# Altium PCB ESC ITERATION 2.PcbDoc (part 2 of 2)
Units mm, origin at the board's own origin, x right, y up, seen from the top; angles counter-clockwise.
Board outline 46 x 52 mm, 4 copper layers (Top Layer, Layer 1, Layer 2, Bottom Layer), stack 0.603 mm thick; 168 components, 143 nets, 732 pads, 629 vias.
Unrouted connection lines stored in the file: 310.
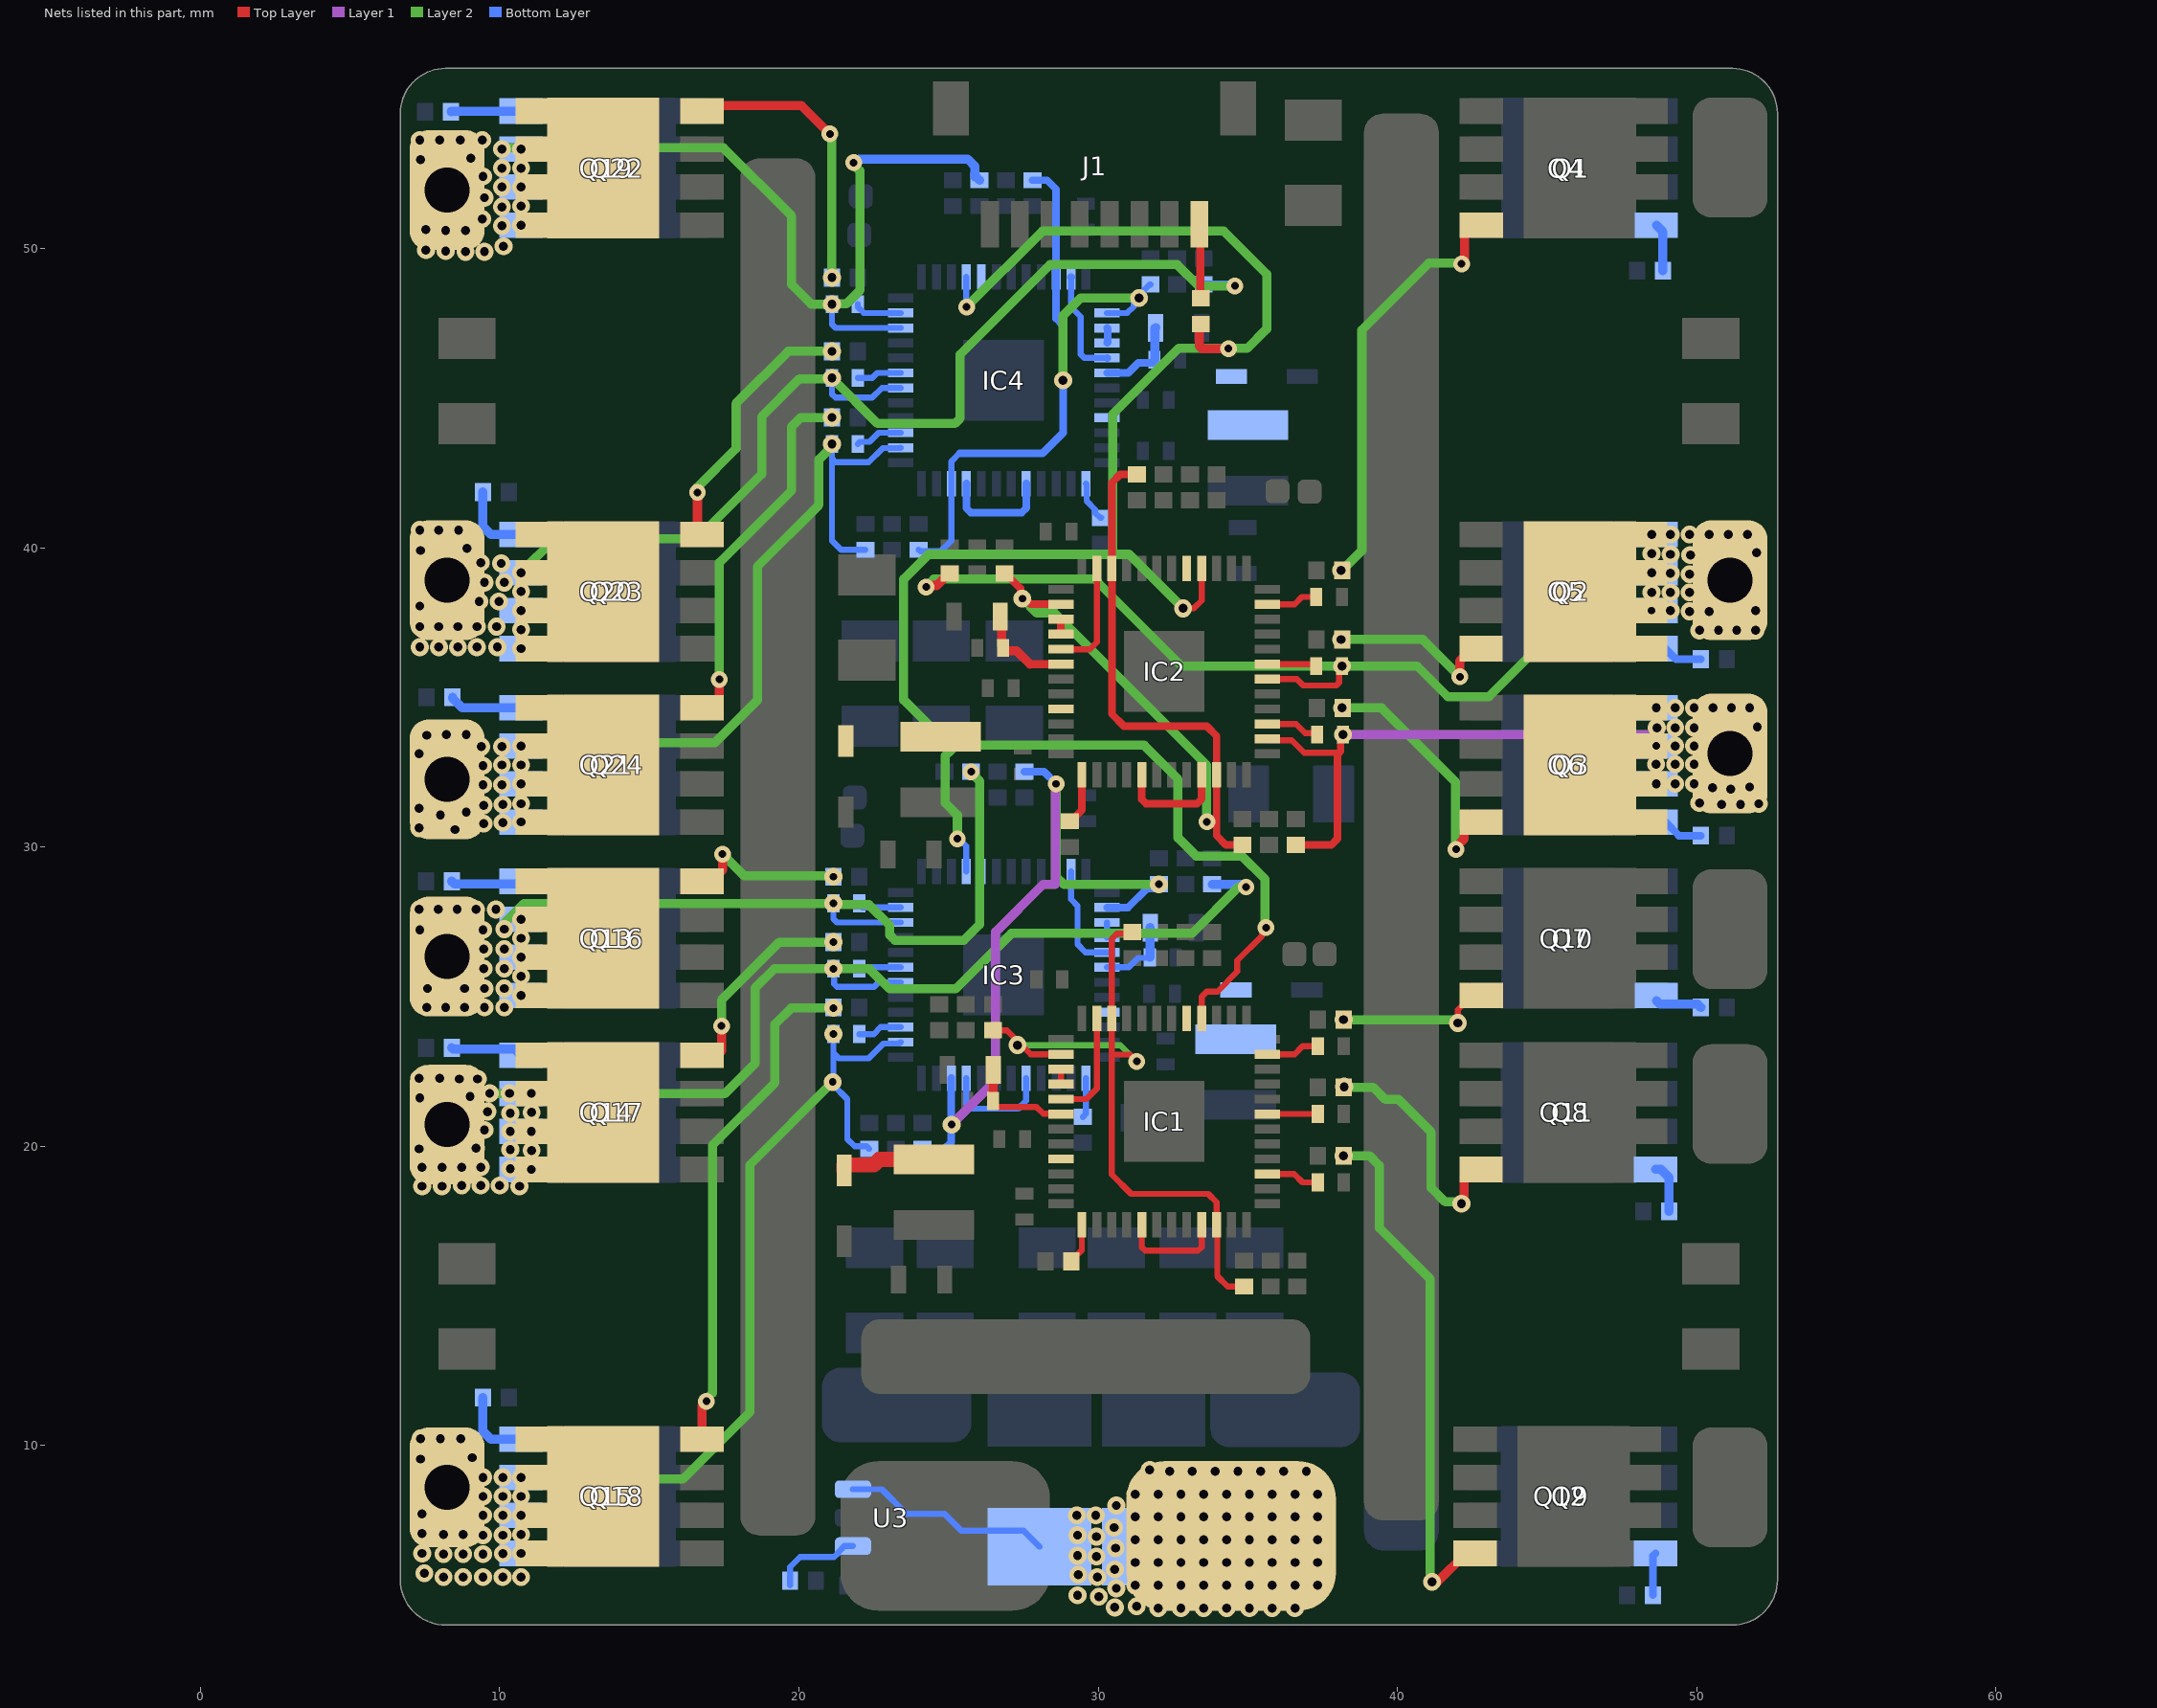
[diagram p4: the nets of this part, all layers, seen from the top]

## Via types
v1: diameter 0.6, hole 0.3, Top Layer to Bottom Layer, tented both sides, 480 vias
v2: diameter 0.559, hole 0.254, Top Layer to Bottom Layer, tented both sides, 127 vias
v3: diameter 1.8, hole 1.5, Top Layer to Bottom Layer, tented both sides, 12 vias
v4: diameter 0.6, hole 0.254, Top Layer to Bottom Layer, tented both sides, 10 vias

## Nets (pads, with @x,y where several pads share a name; then routed paths per layer and width w, separated by ;. In a path a pad name is that pad's centre, name@x,y a point inside that pad or via, vN(x,y) a via of type N, cw(c..) or ccw(c..) an arc to the next point about the centre after c; other vN are vias at no path point) (continued)
MOTOR3B: C7.1 IC2.30 pad.0.8MM@51.105,38.913 Q2.1 Q2.2 Q2.3 Q5.5 Q5.6 Q5.7 Q5.8 Q5.9 R4.1 | length 31.3
  Top Layer w0.203: IC2.30@35.657,35.61 36.638,35.61 36.853,35.395 37.956,35.395 38.049,35.489 38.049,35.941 v1(38.151,36.043)
  Top Layer w0.305: v2(24.252,38.688) 24.301,38.737 24.61,38.737 25.014,39.141 R4.1@25.044,39.141
  Layer 2 w0.305: v2(24.252,38.688) 24.252,38.691 24.514,38.952 29.88,38.952 32.79,36.043 v1(38.151,36.043) 40.658,36.043 41.681,35.02 43.05,35.02 45.901,37.871 48.467,37.871 v2(48.492,37.897)
  other v1: 50.089,37.236 50.724,37.236 51.333,37.236 51.968,37.236 49.759,37.871 50.419,37.871 49.124,37.897 51.968,37.897 48.489,38.506 49.124,38.506 49.759,38.506 49.759,39.116 49.124,39.141 48.492,39.167 49.784,39.751 49.124,39.776 48.489,39.802 51.994,39.827 48.492,40.437 49.124,40.437 49.759,40.437 50.419,40.437 51.054,40.437 51.689,40.437
  other v3: 51.105,38.913
MOTOR3C: C10.1 IC2.26 pad.0.8MM@51.105,33.122 Q3.1 Q3.2 Q3.3 Q6.5 Q6.6 Q6.7 Q6.8 Q6.9 R6.1 | length 18.3
  Top Layer w0.203: IC2.26@35.657,33.61 35.702,33.565 36.474,33.565 36.887,33.152 37.994,33.152 38.024,33.122 ; v1(38.176,33.757) C10.1@38.202,33.731
  Top Layer w0.254: R6.1@36.601,30.073 37.795,30.073 37.998,30.277 37.998,33.096 38.024,33.122 38.1,33.198 38.1,33.63 C10.1@38.202,33.731
  Layer 1 w0.305: v1(38.176,33.757) 48.362,33.757 48.362,33.731 48.648,33.444 v2(48.648,33.376)
  other v1: 50.825,31.42 51.46,31.42 52.07,31.445 50.089,31.471 51.13,31.928 50.521,31.979 51.765,32.004 48.648,32.106 49.276,32.106 49.911,32.106 48.641,32.766 49.276,32.766 49.911,32.766 49.276,33.376 49.911,33.376 48.666,33.985 49.276,33.985 49.911,33.985 52.019,34.011 48.648,34.646 49.276,34.646 49.911,34.646 50.546,34.646 51.156,34.646 51.765,34.646
  other v3: 51.105,33.122
MOTOR4A: C24.1 IC3.34 pad.0.8MM@8.255,26.34 Q13.1 Q13.2 Q13.3 Q16.5 Q16.6 Q16.7 Q16.8 Q16.9 R19.1 | length 25.3
  Layer 2 w0.305: v1@10.033,27.33 10.82,28.118 v4(21.158,28.118) 21.203,28.073 22.342,28.073 23.038,27.377 23.038,27.058 23.216,26.879 25.508,26.879 26.035,27.407 26.035,32.207 25.756,32.486 v2(25.756,32.512)
  Bottom Layer w0.203: v4(21.158,28.118) 21.158,27.599 21.277,27.48 IC3.34@23.398,27.48
  other v1: 7.569,24.638 8.204,24.638 8.839,24.638 9.5,24.638 10.16,24.638 10.721,25.044 7.595,25.273 8.839,25.273 9.5,25.273 10.16,25.273 10.719,25.679 9.474,25.933 10.16,25.933 10.721,26.314 9.474,26.594 10.16,26.594 10.719,26.949 7.341,27.229 7.341,27.229 9.449,27.229 9.449,27.229 10.16,27.254 10.721,27.584 7.315,27.915 7.95,27.915 8.585,27.915 9.22,27.915 9.881,27.915
  other v3: 8.255,26.34
MOTOR4B: C25.1 IC3.30 pad.0.8MM@8.255,20.726 Q14.1 Q14.2 Q14.3 Q17.5 Q17.6 Q17.7 Q17.8 Q17.9 R42.1 | length 34.2
  Layer 2 w0.305: v1(9.673,21.769) 17.54,21.769 18.549,22.777 18.549,25.301 19.182,25.933 v4(21.158,25.933) 22.36,25.933 23.036,25.258 25.243,25.258 27.1,27.114 33.141,27.114 34.689,28.662 v2(34.942,28.662)
  Bottom Layer w0.203: v4(21.158,25.933) 21.184,25.908 21.184,25.425 21.28,25.329 22.516,25.329 22.668,25.48 IC3.30@23.398,25.48
  Bottom Layer w0.305: R42.1@33.807,28.753 34.851,28.753 v2(34.942,28.662)
  other v1: 7.417,18.669 8.077,18.669 10.668,18.669 8.738,18.694 9.373,18.694 10.008,18.694 11.064,19.228 10.363,19.253 7.417,19.304 8.077,19.304 8.738,19.304 9.373,19.304 11.074,19.863 10.363,19.888 7.315,19.914 9.22,19.939 10.363,20.498 11.064,20.498 9.5,20.549 10.363,21.107 11.074,21.133 9.601,21.158 7.341,21.615 9.017,21.666 10.338,21.768 11.064,21.768 8.661,22.25 9.271,22.25 7.315,22.276 8.001,22.276
  other v3: 8.255,20.726
MOTOR4C: C28.1 IC3.26 pad.0.8MM@8.255,8.611 Q15.1 Q15.2 Q15.3 Q18.5 Q18.6 Q18.7 Q18.8 Q18.9 R44.1 | length 27.9
  Layer 2 w0.305: v1@10.719,8.89 16.129,8.89 18.364,11.125 18.364,19.38 v4(21.133,22.149)
  Bottom Layer w0.203: v4(21.133,22.149) 21.133,22.066 21.621,21.578 21.621,20.244 21.866,19.998 22.267,19.998 R44.1@22.352,19.913 ; v4@21.158,22.149 21.158,23.114 ; v4(21.158,23.749) 21.158,23.114 ; IC3.26@23.398,23.48 23.353,23.435 22.825,23.435 22.327,22.936 21.336,22.936 21.158,23.114
  other v1: 8.128,5.613 8.788,5.613 9.449,5.613 10.109,5.613 10.719,5.613 7.493,5.74 8.128,6.375 8.788,6.375 9.449,6.375 7.417,6.401 10.113,6.392 10.719,6.401 9.449,7.01 10.109,7.01 8.128,7.036 8.788,7.036 10.719,7.036 7.417,7.061 9.449,7.671 10.109,7.671 10.719,7.671 7.417,7.722 9.449,8.306 10.109,8.306 10.719,8.306 9.449,8.941 10.109,8.941 10.719,8.941 7.366,9.55 9.093,9.601 7.366,10.236 8.026,10.236 8.712,10.236
  other v3: 8.255,8.611
MOTOR5A: C33.1 IC4.34 pad.0.8MM@8.255,51.943 Q19.1 Q19.2 Q19.3 Q22.5 Q22.6 Q22.7 Q22.8 Q22.9 R57.1 | length 27.9
  Layer 2 w0.305: v1@10.053,53.356 10.719,53.356 17.484,53.356 19.761,51.079 19.761,48.789 20.417,48.133 21.145,48.133 v1(21.107,48.133) 21.127,48.152 21.6,48.152 22.038,48.591 22.038,52.587 21.83,52.795 v2(21.83,52.864)
  Bottom Layer w0.203: v1(21.107,48.133) 21.107,47.458 21.226,47.339 IC4.34@23.398,47.339
  Bottom Layer w0.305: v2(21.83,52.864) 21.899,52.864 22.012,52.977 25.644,52.977 25.888,52.733 25.888,52.391 25.917,52.391 R57.1@26.035,52.273
  other v1: 8.865,49.886 9.5,49.886 8.204,49.911 7.544,49.936 10.135,50.063 8.204,50.597 8.865,50.597 7.544,50.622 10.084,50.749 10.719,50.775 9.423,50.978 10.084,51.384 10.719,51.41 9.5,51.689 10.084,52.045 10.719,52.045 9.449,52.4 10.084,52.68 10.719,52.68 7.366,52.959 9.042,53.01 10.084,53.315 10.719,53.315 7.341,53.619 8.001,53.619 8.687,53.619 9.423,53.619
  other v3: 8.255,51.943
MOTOR5B: C34.1 IC4.30 pad.0.8MM@8.255,38.913 Q20.1 Q20.2 Q20.3 Q23.5 Q23.6 Q23.7 Q23.8 Q23.9 R59.1 | length 36.1
  Layer 2 w0.305: v1(10.719,39.167) 11.849,40.297 16.6,40.297 18.764,42.461 18.764,44.381 20.026,45.642 21.08,45.642 v1(21.107,45.669) 22.631,44.145 25.213,44.145 25.391,44.324 25.391,46.454 28.391,49.454 32.639,49.454 33.35,48.743 v2(34.569,48.743)
  Bottom Layer w0.203: v1(21.107,45.669) 21.107,45.128 21.226,45.009 22.454,45.009 22.783,45.339 IC4.30@23.398,45.339
  Bottom Layer w0.305: R59.1@33.528,48.793 33.553,48.768 34.544,48.768 v2(34.569,48.743)
  other v1: 10.719,36.627 7.341,36.678 7.976,36.678 8.611,36.678 9.246,36.678 9.931,36.678 10.719,37.262 7.341,37.363 7.976,37.363 8.611,37.363 9.246,37.363 9.906,37.363 10.719,37.897 7.341,38.049 9.322,38.202 9.982,38.202 10.719,38.532 9.5,38.837 10.16,38.837 10.058,39.472 9.373,39.497 7.366,39.903 8.915,39.98 7.341,40.589 7.976,40.589 8.636,40.589
  other v3: 8.255,38.913
MOTOR5C: C37.1 IC4.26 pad.0.8MM@8.255,32.258 Q21.1 Q21.2 Q21.3 Q24.5 Q24.6 Q24.7 Q24.8 Q24.9 R61.1 | length 25.1
  Layer 2 w0.305: v1(10.719,33.376) 10.82,33.477 17.196,33.477 18.618,34.9 18.618,39.37 20.676,41.427 20.676,42.948 21.107,43.38 v1(21.107,43.459)
  Bottom Layer w0.203: v1(21.107,43.459) 21.107,42.974 ; R61.1@22.225,39.928 21.413,39.928 21.107,40.234 21.107,42.974 ; IC4.26@23.398,43.339 23.388,43.329 22.808,43.329 22.334,42.855 21.226,42.855 21.107,42.974
  other v1: 8.509,30.582 7.315,30.632 9.474,30.785 10.109,30.81 10.719,30.836 8.026,31.064 8.89,31.166 7.315,31.293 9.474,31.394 10.109,31.42 10.719,31.445 9.449,32.08 10.084,32.08 10.719,32.106 9.449,32.715 10.084,32.741 10.719,32.741 7.315,33.122 9.398,33.35 10.084,33.35 7.569,33.731 8.23,33.757 8.89,33.757
  other v3: 8.255,32.258
NetC6_2: C6.2 IC2.35 | length 1.7
  Top Layer w0.203: IC2.35@35.657,38.11 36.561,38.11 36.805,38.354 C6.2@37.287,38.354
NetC7_2: C7.2 IC2.31 | length 1.7
  Top Layer w0.203: IC2.31@35.657,36.11 37.219,36.11 C7.2@37.287,36.043
NetC10_2: C10.2 IC2.27 | length 1.8
  Top Layer w0.203: IC2.27@35.657,34.11 36.616,34.11 36.92,33.806 37.263,33.806 C10.2@37.312,33.757
NetC18_2: C18.2 IC1.35 | length 1.8
  Top Layer w0.203: IC1.35@35.657,23.078 36.565,23.078 36.83,23.343 C18.2@37.338,23.343
NetC19_2: C19.2 IC1.31 | length 1.7
  Top Layer w0.203: IC1.31@35.657,21.078 35.659,21.08 37.336,21.08 C19.2@37.338,21.082
NetC22_2: C22.2 IC1.27 | length 1.8
  Top Layer w0.203: IC1.27@35.657,19.078 36.548,19.078 36.83,18.796 C22.2@37.338,18.796
NetC24_2: C24.2 IC3.35 | length 1.5
  Bottom Layer w0.203: C24.2@22.022,28.118 22.022,28.082 22.124,27.98 IC3.35@23.398,27.98
NetC25_2: C25.2 IC3.31 | length 1.4
  Bottom Layer w0.203: C25.2@22.022,25.933 22.069,25.98 IC3.31@23.398,25.98
NetC28_2: C28.2 IC3.27 | length 1.5
  Bottom Layer w0.203: C28.2@22.022,23.749 22.504,23.749 22.736,23.98 IC3.27@23.398,23.98
NetC33_2: C33.2 IC4.35 | length 1.6
  Bottom Layer w0.203: C33.2@21.971,48.133 21.971,48.036 22.169,47.839 IC4.35@23.398,47.839
NetC34_2: C34.2 IC4.31 | length 1.5
  Bottom Layer w0.203: C34.2@21.971,45.669 22.454,45.669 22.623,45.839 IC4.31@23.398,45.839
NetC37_2: C37.2 IC4.27 | length 1.6
  Bottom Layer w0.203: C37.2@21.971,43.459 22.047,43.535 22.36,43.535 22.664,43.839 IC4.27@23.398,43.839
NetD1_C: D1.C IC2.9 L1.1
NetD2_C: D2.C IC1.9 L2.1 | length 3.3
  Top Layer w0.508: D2.C@21.514,19.194 21.514,19.376 21.518,19.38 22.504,19.38 22.682,19.558 L2.1@24.511,19.558
NetD3_C: D3.C IC3.9 L3.1
NetD4_C: D4.C IC4.9 L4.1
NetIC1_3: IC1.3 IC1.4 | length 0.5
  Top Layer w0.203: IC1.4@28.757,22.078 IC1.3@28.757,22.578
NetIC1_13: IC1.13 R35.2 | length 1.4
  Top Layer w0.203: R35.2@29.109,16.154 29.109,16.184 29.457,16.533 IC1.13@29.457,17.378
NetIC2_3: IC2.3 IC2.4 | length 0.5
  Top Layer w0.254: IC2.4@28.757,37.11 IC2.3@28.757,37.61
NetIC2_13: IC2.13 R17.2 | length 1.7
  Top Layer w0.254: R17.2@29.058,30.861 29.088,30.861 29.457,31.231 IC2.13@29.457,32.41
NetIC3_3: IC3.3 IC3.4 | length 0.5
  Bottom Layer w0.203: IC3.4@30.298,26.98 IC3.3@30.298,27.48
NetIC3_13: IC3.13 R55.2 | length 1.3
  Bottom Layer w0.203: R55.2@29.489,20.981 29.598,21.089 IC3.13@29.598,22.28
NetIC4_3: IC4.3 IC4.4 | length 0.5
  Bottom Layer w0.254: IC4.4@30.298,46.839 30.321,46.862 30.321,47.316 IC4.3@30.298,47.339
NetIC4_13: IC4.13 R72.2 | length 1.4
  Bottom Layer w0.203: IC4.13@29.598,42.139 29.618,42.119 29.618,41.559 29.901,41.276 29.901,41.164 30.069,40.996 R72.2@30.099,40.996
NetJ1_1: J1.1 R73.2 | length 2.5
  Top Layer w0.279: J1.1@33.385,50.8 33.418,50.767 33.418,48.344 R73.2@33.426,48.336
NetQ1_4: Q1.4 R11.1 | length 1.6
  Bottom Layer w0.305: Q1.4@48.648,50.775 48.87,50.553 R11.1@48.87,49.251
NetQ2_4: Q2.4 R12.1 | length 1.6
  Bottom Layer w0.254: Q2.4@48.648,36.627 48.948,36.627 49.303,36.271 R12.1@50.139,36.271
NetQ3_4: Q3.4 R13.1 | length 1.7
  Bottom Layer w0.254: Q3.4@48.648,30.836 48.948,30.836 49.405,30.378 R13.1@50.139,30.378
NetQ4_4: Q4.4 R14.1 | length 14.3
  Top Layer w0.305: v2(42.143,49.482) 42.143,49.551 42.247,49.655 42.247,50.502 42.52,50.775 Q4.4@42.799,50.775
  Layer 2 w0.305: v1(38.121,39.243) 38.151,39.243 38.811,39.903 38.811,47.269 41.05,49.508 v2@42.136,49.508
NetQ5_4: Q5.4 R15.1 | length 5.9
  Top Layer w0.305: v2(42.088,35.688) 42.088,36.223 42.492,36.627 Q5.4@42.792,36.627
  Layer 2 w0.305: v1(38.121,36.932) 40.844,36.932 v2(42.088,35.688)
NetQ6_4: Q6.4 R16.1 | length 8.5
  Top Layer w0.305: v2(41.961,29.921) 42.009,29.97 42.009,30.053 42.22,30.263 42.22,30.563 42.492,30.836 Q6.4@42.792,30.836
  Layer 2 w0.305: v1(38.146,34.646) 39.467,34.646 41.935,32.177 41.935,29.947 v2(41.961,29.921)
NetQ7_4: Q7.4 R36.1 | length 1.6
  Bottom Layer w0.305: Q7.4@48.648,24.867 48.762,24.752 50.025,24.752 R36.1@50.139,24.638
NetQ8_4: Q8.4 R37.1 | length 1.7
  Bottom Layer w0.305: Q8.4@48.622,19.228 48.8,19.228 49.073,18.955 R37.1@49.073,17.831
NetQ9_4: Q9.4 R38.1 | length 1.4
  Bottom Layer w0.254: R38.1@48.54,5.004 48.54,6.318 Q9.4@48.622,6.401
NetQ10_4: Q10.4 R39.1 | length 5.3
  Top Layer w0.203: v1(42.018,24.119) 42.018,24.563 42.499,25.044 Q10.4@42.799,25.044
  Layer 2 w0.305: v1(38.202,24.232) 41.843,24.232 41.964,24.111 v1@42.044,24.111
NetQ11_4: Q11.4 R40.1 | length 8.2
  Top Layer w0.305: v1(42.139,18.085) 42.22,18.166 42.22,18.955 42.492,19.228 Q11.4@42.792,19.228
  Layer 2 w0.305: v1(38.221,21.99) 38.24,21.971 39.192,21.971 39.601,21.562 40.039,21.562 41.128,20.473 41.128,18.613 41.6,18.141 42.082,18.141 v1(42.139,18.085)
NetQ12_4: Q12.4 R41.1 | length 17.8
  Top Layer w0.305: v1(41.151,5.454) 41.342,5.454 42.289,6.401 Q12.4@42.589,6.401
  Layer 2 w0.305: v1(38.202,19.685) 39.065,19.685 39.395,19.355 39.395,17.272 41.097,15.57 41.097,5.507 v1(41.151,5.454)
NetQ13_4: Q13.4 R49.1 | length 2.4
  Bottom Layer w0.305: R49.1@8.408,28.854 8.497,28.765 10.632,28.765 Q13.4@10.721,28.854
NetQ14_4: Q14.4 R50.1 | length 2.4
  Bottom Layer w0.305: R50.1@8.408,23.292 8.452,23.248 10.509,23.248 Q14.4@10.719,23.038
NetQ15_4: Q15.4 R51.1 | length 2.9
  Bottom Layer w0.305: R51.1@9.449,11.608 9.449,10.483 9.721,10.211 Q15.4@11.064,10.211
NetQ16_4: Q16.4 R52.1 | length 5.5
  Top Layer w0.305: Q16.4@16.764,28.677 16.981,28.677 16.981,28.759 17.448,29.226 v2(17.448,29.762)
  Layer 2 w0.305: v2(17.448,29.762) 18.177,29.032 21.133,29.032 v4(21.158,29.007)
NetQ17_4: Q17.4 R53.1 | length 6.4
  Top Layer w0.305: Q17.4@17.31,23.076 17.415,23.181 v2(17.415,24.023)
  Layer 2 w0.305: v2(17.415,24.023) 17.415,24.885 19.353,26.822 v4(21.158,26.822)
NetQ18_4: Q18.4 R54.1 | length 17.7
  Top Layer w0.305: v2(16.914,11.486) 16.764,11.336 Q18.4@16.764,10.211 17.064,10.211 Q18.4@17.337,10.483
  Layer 2 w0.305: v2(16.914,11.486) 16.914,11.555 17.118,11.759 17.118,20.039 19.202,22.123 19.202,24.079 19.745,24.622 v4(21.158,24.622)
NetQ19_4: Q19.4 R66.1 | length 2.3
  Bottom Layer w0.305: R66.1@8.382,54.559 8.395,54.572 10.706,54.572 Q19.4@10.719,54.585
NetQ20_4: Q20.4 R67.1 | length 2.5
  Bottom Layer w0.305: R67.1@9.449,41.859 9.449,40.709 9.721,40.437 Q20.4@10.719,40.437
NetQ21_4: Q21.4 R68.1 | length 2.5
  Bottom Layer w0.305: R68.1@8.433,35.001 8.433,34.971 8.759,34.646 Q21.4@10.719,34.646
NetQ22_4: Q22.4 R69.1 | length 9.9
  Top Layer w0.305: Q22.4@16.64,54.461 16.516,54.585 Q22.4@16.764,54.585 ; Q22.4@16.764,54.761 20.094,54.761 v2(21.038,53.818)
  Layer 2 w0.305: v2(21.038,53.818) 21.107,53.749 v1(21.107,49.022)
NetQ23_4: Q23.4 R70.1 | length 8.9
  Top Layer w0.305: v2(16.615,41.84) 16.615,40.586 Q23.4@16.764,40.437
  Layer 2 w0.305: v2(16.615,41.84) 16.615,42.018 17.897,43.301 17.897,44.808 19.648,46.558 v1(21.107,46.558)
NetQ24_4: Q24.4 R71.1 | length 12.3
  Top Layer w0.305: Q24.4@16.764,34.646 17.064,34.646 17.344,34.925 v2(17.344,35.602)
  Layer 2 w0.305: v2(17.344,35.602) 17.344,39.492 19.761,41.91 19.761,44.044 20.066,44.348 v1(21.107,44.348)
NetR31_1: R31.1 U3.1 | length 3
  Bottom Layer w0.203: R31.1@19.71,5.334 19.71,5.946 20.048,6.283 21.186,6.283 21.305,6.402 21.305,6.426 21.523,6.645 U3.1@21.808,6.645
PA62: IC1.17 IC1.21 | length 3.6
  Top Layer w0.203: IC1.17@31.457,17.378 31.457,16.634 31.576,16.515 33.338,16.515 33.457,16.634 IC1.21@33.457,17.378
PA63: IC2.17 IC2.21 | length 3.8
  Top Layer w0.254: IC2.17@31.457,32.41 31.457,31.594 31.606,31.445 33.303,31.445 33.457,31.599 IC2.21@33.457,32.41
PA64: IC3.17 IC3.21 | length 3.8
  Bottom Layer w0.203: IC3.21@25.598,22.28 25.598,21.418 25.756,21.26 27.33,21.26 27.598,21.527 IC3.17@27.598,22.28
PA65: IC4.17 IC4.21 | length 3.8
  Bottom Layer w0.254: IC4.21@25.598,42.139 25.598,41.322 25.747,41.173 27.449,41.173 27.598,41.322 IC4.17@27.598,42.139
PF12: IC1.5 IC1.47 | length 3.7
  Top Layer w0.203: IC1.5@28.757,21.578 29.604,21.578 29.957,21.931 IC1.47@29.957,24.278
PF13: IC2.5 IC2.47 | length 3.8
  Top Layer w0.203: IC2.5@28.757,36.61 28.766,36.601 29.718,36.601 29.957,36.841 IC2.47@29.957,39.31
PF14: IC3.5 IC3.47 | length 3.6
  Bottom Layer w0.203: IC3.47@29.098,29.18 29.098,28.25 29.312,28.036 29.312,26.746 29.578,26.48 IC3.5@30.298,26.48
PF15: IC4.5 IC4.47 | length 3.6
  Bottom Layer w0.203: IC4.47@29.093,49.034 29.093,48.041 29.416,47.718 29.416,46.459 29.536,46.34 IC4.5@30.298,46.339
  Bottom Layer w0.254: IC4.47@29.093,49.034 IC4.47@29.098,49.039 ; IC4.5@30.298,46.339 IC4.5@30.298,46.339
TELEM: IC1.40 IC2.40 IC3.40 IC4.40 R73.1 | length 69.7
  Top Layer w0.203: v1@32.944,37.973 33.198,37.973 33.457,38.232 IC2.40@33.457,39.31 ; IC1.40@33.457,24.278 33.457,24.999 33.63,25.171 33.985,25.171 34.65,25.836 34.65,26.206 35.47,27.026 35.47,27.068 35.611,27.209 v2(35.611,27.305)
  Top Layer w0.305: R73.1@33.426,47.472 33.376,47.422 33.376,46.738 33.461,46.652 v2(34.355,46.652)
  Layer 2 w0.305: v2(25.298,30.277) 25.298,31.064 24.892,31.471 24.892,33.045 25.07,33.223 ; v2(25.607,48.039) 28.14,50.573 34.198,50.573 35.632,49.139 35.632,47.306 34.986,46.66 32.69,46.66 30.489,44.459 30.489,39.776 ; v1(32.842,37.973) 31.039,39.776 30.489,39.776 ; v2@35.49,27.228 35.577,27.314 35.577,28.925 34.802,29.7 33.275,29.7 32.669,30.305 32.669,32.267 31.536,33.401 25.248,33.401 25.07,33.223 ; v2@35.567,27.305 v2(35.611,27.305) ; 25.07,33.223 25.07,33.35 23.506,34.914 23.506,38.95 24.333,39.776 30.489,39.776
  Bottom Layer w0.203: v2(25.298,30.277) 25.349,30.277 25.598,30.028 IC3.40@25.598,29.18 ; IC4.40@25.598,49.039 25.598,48.048 v2(25.607,48.039)
TP: IC1.41
TP3: IC2.41
TP4: IC3.41
TP5: IC4.41
VG2: IC1.2 IC1.22 IC1.46 R21.2 R23.2 R25.2 | length 23.6
  Top Layer w0.203: R23.2@26.492,23.876 26.95,23.876 27.308,23.517 v1(27.308,23.381) ; v1@27.563,23.262 27.747,23.078 IC1.2@28.757,23.078 ; R21.2@31.14,27.153 31.089,27.102 30.632,27.102 30.457,26.927 IC1.46@30.457,24.278 30.457,23.063 ; v2(31.293,22.835) 31.064,23.063 30.457,23.063 ; R25.2@34.874,15.316 34.329,15.316 33.983,15.662 33.983,17.352 IC1.22@33.957,17.378 33.957,18.133 33.679,18.411 31.102,18.411 30.457,19.056 30.457,23.063
  Layer 2 w0.203: v1(27.308,23.381) 30.746,23.381 v2(31.293,22.835)
VG3: IC2.2 IC2.22 IC2.46 R1.2 R3.2 R5.2 | length 29.6
  Top Layer w0.254: R3.2@26.873,39.141 26.903,39.141 27.402,38.642 27.402,38.363 27.496,38.363 27.748,38.11 IC2.2@28.757,38.11 ; R1.2@31.293,42.444 30.734,42.444 30.457,42.167 IC2.46@30.457,39.31 30.457,34.443 30.865,34.036 33.63,34.036 33.957,33.708 IC2.22@33.957,32.41 33.957,30.381 34.265,30.074 R5.2@34.823,30.074
  Layer 2 w0.305: v4(27.469,38.297) 27.94,37.826 28.535,37.826 33.63,32.731 33.63,30.847 v2(33.634,30.843)
VG4: IC3.2 IC3.22 IC3.46 R18.2 R20.2 R43.2 | length 28.9
  Layer 1 w0.305: v4(25.104,20.726) 26.576,22.198 26.576,27.16 28.169,28.753 28.575,28.753 28.575,32.085 v2(28.598,32.108)
  Layer 2 w0.305: v2(28.598,32.108) 28.598,29.008 28.853,28.753 v4(32.029,28.753)
  Bottom Layer w0.254: R43.2@24.13,19.913 24.866,19.913 25.095,20.142 25.095,22.278 IC3.22@25.098,22.28 ; R18.2@27.534,32.512 28.194,32.512 v2(28.598,32.108) IC3.46@28.598,29.18 ; IC3.2@30.298,27.98 31,27.98 31.629,28.61 R20.2@31.886,28.61
VG5: IC4.2 IC4.22 IC4.46 R56.2 R58.2 R60.2 | length 24.1
  Layer 2 w0.305: v1(28.829,45.593) 28.829,47.752 29.413,48.336 v1(31.369,48.336)
  Bottom Layer w0.203: R60.2@24.003,39.928 24.053,39.878 24.74,39.878 25.098,40.236 IC4.22@25.098,42.139 25.098,42.878 25.375,43.155 ; IC4.2@30.298,47.839 30.973,47.839 31.191,48.057 31.191,48.264 31.72,48.793 R58.2@31.75,48.793
  Bottom Layer w0.254: 25.375,43.155 28.143,43.155 28.829,43.84 v1(28.829,45.593) 28.829,47.422 28.598,47.653 IC4.46@28.598,49.039 28.598,51.971 28.296,52.273 R56.2@27.813,52.273
VM: pad.XT60@34.442,6.985 R32.1 R33.1 U3.3 | length 7.1
  Bottom Layer w0.203: U3.3@21.808,8.545 22.774,8.545 23.597,7.722 24.867,7.722 25.425,7.163 27.504,7.163 R33.1@28.042,6.625
  Bottom Layer w0.381: v1(37.338,5.334) v1@37.351,5.321 ; v1(37.338,6.096) v1@37.346,6.104 ; v1(37.338,6.858) v1@37.346,6.866
  other v1: 32.004,4.572 32.766,4.572 33.528,4.572 34.29,4.572 35.052,4.572 35.814,4.572 36.576,4.572 30.556,4.597 31.286,4.632 30.023,4.953 29.312,5.004 30.607,5.232 31.242,5.334 32.004,5.334 32.766,5.334 33.528,5.334 34.29,5.334 35.052,5.334 35.814,5.334 36.576,5.334 29.972,5.613 29.337,5.69 30.556,5.867 31.242,6.096 32.004,6.096 32.766,6.096 33.528,6.096 34.29,6.096 35.052,6.096 35.814,6.096 36.576,6.096 29.947,6.299 29.312,6.325 30.582,6.579 31.242,6.858 32.004,6.858 32.766,6.858 33.528,6.858 34.29,6.858 35.052,6.858 35.814,6.858 36.576,6.858 29.947,6.96 29.312,7.01 30.531,7.264 31.242,7.62 32.004,7.62 32.766,7.62 33.528,7.62 34.29,7.62 35.052,7.62 35.814,7.62 36.576,7.62 37.338,7.62 29.286,7.671 29.921,7.671 30.607,8.001 31.242,8.382 32.004,8.382 32.766,8.382 33.528,8.382 34.29,8.382 35.052,8.382 35.814,8.382 36.576,8.382 37.338,8.382 32.385,9.144 33.147,9.144 33.909,9.144 34.671,9.144 35.433,9.144 36.195,9.144 36.957,9.144 31.725,9.195
VREG122: C3.2 C15.2 IC1.6 | length 3.4
  Top Layer w0.203: C15.2@26.492,21.417 26.594,21.315 27.935,21.315 28.165,21.086 28.75,21.086 IC1.6@28.757,21.078
  Top Layer w0.305: C15.2@26.492,21.514 26.496,21.518 26.496,22.551 C3.2@26.5,22.555
VREG123: C4.2 C11.2 IC2.6 | length 3.3
  Top Layer w0.279: 27.72,36.11 IC2.6@28.757,36.11
  Top Layer w0.305: C11.2@26.729,37.694 26.776,37.647 26.776,36.699 C4.2@26.823,36.652 26.823,36.611 26.873,36.56 27.27,36.56 27.72,36.11
VREG124: C12.2 C14.2 IC3.6 | length 2.6
  Bottom Layer w0.203: IC3.6@30.298,25.98 31.022,25.98 31.335,26.294 31.704,26.294 C12.2@31.724,26.314
  Bottom Layer w0.305: C12.2@31.724,26.314 31.733,26.323 31.733,27.296 C14.2@31.742,27.305
VREG125: C30.2 C31.2 IC4.6 | length 2.9
  Bottom Layer w0.254: IC4.6@30.298,45.839 31.005,45.839 31.344,46.177 31.801,46.177 31.877,46.253 C31.2@31.877,46.279
  Bottom Layer w0.305: C31.2@31.877,46.279 31.898,46.3 31.898,47.324 C30.2@31.92,47.346
pads on no net: IC1.7 IC1.11 IC1.12 IC1.14 IC1.15 IC1.16 IC1.18 IC1.19 IC1.20 IC1.24 IC1.39 IC1.43 IC2.7 IC2.11 IC2.12 IC2.14 IC2.15 IC2.16 IC2.18 IC2.19 IC2.20 IC2.24 IC2.39 IC2.43 IC3.7 IC3.11 IC3.12 IC3.14 IC3.15 IC3.16 IC3.18 IC3.19 IC3.20 IC3.24 IC3.39 IC3.43 IC4.7 IC4.11 IC4.12 IC4.14 IC4.15 IC4.16 IC4.18 IC4.19 IC4.20 IC4.24 IC4.39 IC4.43

## Polygon pours and split planes (outlines as drawn)
6S on Bottom Layer "B" (solid, pour order 85): 19.38,55.601 19.431,55.651 23.698,55.651 23.927,55.423 23.927,53.67 23.673,53.416 19.456,53.416 19.38,53.492
MOTOR2C on Bottom Layer "B" (solid, pour order 65): 47.854,10.643 47.904,10.693 52.146,10.693 52.375,10.465 52.375,6.883 52.07,6.579 49.962,6.579 49.352,7.188 47.904,7.188 47.854,7.239
MOTOR2B on Bottom Layer "B" (solid, pour order 64): 47.854,23.444 47.93,23.52 52.146,23.52 52.375,23.292 52.375,19.583 52.172,19.38 50.089,19.38 49.454,20.015 47.93,20.015 47.854,20.091
MOTOR2A on Bottom Layer "B" (solid, pour order 63): 47.879,25.908 47.93,25.857 49.555,25.857 50.19,25.222 52.07,25.222 52.375,25.527 52.375,28.981 52.045,29.312 47.904,29.312 47.879,29.286
MOTOR3C on Bottom Layer "B" (solid, pour order 62): 47.879,35.077 47.981,35.179 52.121,35.179 52.375,34.925 52.375,31.318 52.172,31.115 49.962,31.115 49.454,31.623 47.904,31.623 47.879,31.648
MOTOR3B on Bottom Layer "B" (solid, pour order 61): 47.879,37.516 47.955,37.44 49.378,37.44 49.911,36.906 52.095,36.906 52.375,37.186 52.375,40.564 51.994,40.945 47.93,40.945 47.879,40.894
MOTOR3A on Bottom Layer "B" (solid, pour order 59): 47.854,54.966 47.955,55.067 52.172,55.067 52.375,54.864 52.375,51.105 52.197,50.927 50.114,50.927 49.479,51.562 47.955,51.562 47.854,51.664
MOTOR4C on Bottom Layer "B" (solid, pour order 58): 11.481,9.398 11.455,9.423 9.779,9.423 9.119,10.084 9.119,10.262 8.687,10.693 7.163,10.693 7.01,10.541 7.01,5.791 7.595,5.207 11.481,5.207
GND on Bottom Layer "B" (solid, pour order 53): 21.336,34.773 30.124,34.773 31.293,35.941 33.909,35.941 34.087,35.763 34.087,34.569 34.392,34.265 35.484,34.265 36.068,33.68 36.068,32.156 35.382,31.471 29.337,31.471 29.286,31.521 29.286,32.563 28.575,33.274 21.336,33.274
GND on Bottom Layer "B" (solid, pour order 52): 27.432,49.479 27.762,49.479 27.762,47.473 28.194,47.041 28.194,46.609 28.143,46.66 27.203,46.66 27.432,46.888
6S on Bottom Layer "B" (solid, pour order 51): 7.696,14.3 7.696,12.421 7.823,12.294 11.303,12.294 12.294,11.303 12.776,11.303 12.776,18.593 12.344,19.025 11.405,18.085 10.617,18.085 10.389,17.856 10.389,14.478 10.211,14.3
MOTOR4B on Bottom Layer "B" (solid, pour order 49): 11.455,22.225 11.506,22.174 11.506,18.796 11.074,18.364 7.188,18.364 6.985,18.567 6.985,22.53 7.214,22.758 9.474,22.758 9.627,22.606 9.627,22.377 9.779,22.225
MOTOR4A on Bottom Layer "B" (solid, pour order 48): 11.43,28.067 10.262,28.067 10.109,28.219 7.036,28.219 7.01,28.194 7.01,24.46 7.163,24.308 11.405,24.308 11.506,24.409 11.506,27.991
MOTOR5C on Bottom Layer "B" (solid, pour order 46): 11.455,33.833 11.455,30.404 11.252,30.201 7.264,30.201 7.01,30.455 7.01,34.442 8.179,34.442 8.433,34.188 9.093,34.188 9.449,33.833
MOTOR5B on Bottom Layer "B" (solid, pour order 44): 11.43,39.802 11.532,39.7 11.532,36.144 11.43,36.043 7.137,36.043 7.01,36.17 7.01,40.792 7.163,40.945 8.814,40.945 9.068,40.691 9.068,40.335 9.601,39.802
MOTOR5A on Bottom Layer "A" (solid, pour order 42): 11.455,53.746 11.405,53.797 10.236,53.797 10.084,53.95 7.061,53.95 6.985,53.873 6.985,49.936 7.493,49.428 9.804,49.428 9.931,49.555 10.084,49.555 10.744,50.216 11.455,50.216
GND on Bottom Layer "GND" (solid, pour order 39): 32.36,25.984 32.36,26.645 32.588,26.873 32.588,29.032 32.614,29.058 33.223,29.058 33.249,29.032 33.249,28.296 35.255,28.296 35.509,28.55 35.509,29.54 38.608,29.54 38.608,27.838 35.662,27.838 35.281,27.457 35.281,27.051 35.027,26.797 33.68,26.797 32.893,26.01 32.893,25.984
GND on Bottom Layer "GND" (solid, pour order 38): 27.432,29.616 27.762,29.616 27.762,28.296 28.092,27.965 28.092,26.949 27.102,26.949 27.102,27.94 27.432,28.27
GND on Bottom Layer "GND" (solid, pour order 37): 30.353,21.438 31.979,21.438 32.106,21.311 32.106,17.932 30.353,17.932
GND on Bottom Layer "GND" (solid, pour order 36): 22.911,20.193 23.571,20.193 23.571,18.796 24.206,18.161 35.662,18.161 36.322,17.501 36.322,15.494 21.946,15.494 21.438,16.002 21.438,18.085 22.2,18.085 22.911,18.796
GND on Bottom Layer "GND" (solid, pour order 28): 34.29,32.766 34.29,30.099 36.068,28.321 38.557,28.321 38.608,28.372 38.608,28.423 38.608,30.378 38.557,30.429 37.084,30.429 36.068,31.445 36.068,32.766
6S on Bottom Layer "6S" (solid, pour order 27): 19.914,37.592 19.736,37.414 19.736,35.484 28.194,35.484 28.194,37.592
6S on Bottom Layer "GND" (solid, pour order 26): 7.595,46.076 10.033,46.076 10.262,46.304 10.262,49.403 10.693,49.835 12.471,49.835 12.471,42.799 12.217,42.545 7.772,42.545 7.569,42.748
6S on Bottom Layer "GND" (solid, pour order 25): 12.09,55.575 12.09,5.207 12.37,4.928 18.364,4.928 18.847,5.41 18.847,6.401 19.152,6.706 20.549,6.706 20.549,54.839 19.787,55.601
6S on Bottom Layer "GND" (solid, pour order 23): 47.346,50.825 47.346,48.92 48.92,47.346 48.92,45.949 49.352,45.517 51.283,45.517 51.537,45.263 51.537,43.434 50.749,42.647 49.251,42.647 49.251,42.621 48.158,41.529 47.244,41.529 47.244,18.745 46.812,18.313 46.812,17.424 47.142,17.094 48.489,17.094 48.946,16.637 48.946,14.783 49.2,14.529 51.206,14.529 51.638,14.097 51.638,12.344 51.562,12.268 47.854,12.268 47.219,11.633 47.219,5.969 39.522,5.969 38.887,6.604 38.887,50.825
NetD4_C on Bottom Layer "GND" (solid, pour order 15): 29.845,44.501 33.452,44.501 33.604,44.653 33.604,44.933 33.833,45.161 33.833,45.949 33.909,46.025 35.027,46.025 35.103,45.949 35.103,44.933 35.331,44.704 36.373,44.704 36.5,44.577 36.5,43.866 31.623,43.866 31.318,44.171 29.845,44.171
GND on Bottom Layer "GND" (solid, pour order 21): 32.309,49.073 32.995,49.073 32.995,48.514 33.172,48.336 34.112,48.336 35.662,48.336 37.414,46.584 37.414,45.415 37.338,45.339 35.763,45.339 35.611,45.491 35.611,46.736 35.331,47.015 34.138,47.015 33.934,46.812 33.477,46.812 33.045,46.38 33.045,45.974 32.995,45.923 32.537,45.923 32.461,45.999 32.461,48.285 32.334,48.412 32.309,48.412
6S on Bottom Layer "GND" (solid, pour order 19): 36.144,54.839 36.576,55.27 47.269,55.27 47.346,55.194 47.346,50.317 46.888,49.86 36.83,49.86 36.144,50.546
NetD3_C on Bottom Layer "GND" (solid, pour order 5): 29.87,24.638 29.87,24.232 32.715,24.232 33.274,23.673 33.274,23.012 35.966,23.012 36.043,23.089 36.043,24.079 35.992,24.13 35.56,24.13 35.204,24.486 35.204,25.502 35.154,25.552 34.087,25.552 34.036,25.502 34.036,24.79 33.884,24.638
6S on Bottom Layer "GND" (solid, pour order 1): 18.034,14.529 18.034,10.566 18.669,9.931 40.716,9.931 41.377,10.592 41.377,14.554
VM on Bottom Layer "GND" (solid, pour order 0): 26.213,7.976 30.048,7.976 31.598,9.525 37.211,9.525 38.024,8.712 38.024,5.156 37.059,4.191 26.213,4.191
GND on Top Layer "B" (solid, pour order 79): 22.657,23.368 19.99,23.368 19.736,23.114 19.787,23.063 19.787,20.676 21.158,20.676 21.539,20.295 22.479,20.295 22.657,20.472
GND on Top Layer "B" (solid, pour order 74): 25.502,46.939 28.194,46.939 28.702,46.431 28.702,40.411 28.473,40.183 27.788,40.183 27.229,40.742 24.638,40.742 23.851,39.954 23.851,39.04 20.447,39.04 20.345,39.141 20.345,42.901 21.361,42.901 21.666,43.205 21.666,46.38 22.25,46.965
6S on Top Layer "B" (solid, pour order 82): 26.746,51.537 26.645,51.638 24.257,51.638 23.927,51.968 23.927,55.423 23.698,55.651 21.742,55.651 21.539,55.448 21.539,49.962 21.92,49.581 26.568,49.581 26.746,49.759
GND on Top Layer "B" (solid, pour order 84): 27.153,32.664 27.178,32.69 27.788,32.69 28.169,32.309 28.169,31.826 28.423,31.572 28.423,26.06 28.27,25.908 27.457,25.908 27.457,30.582 27.153,30.886
GND on Top Layer "B" (solid, pour order 83): 35.509,29.743 31.902,29.743 31.267,29.108 31.267,28.067 31.674,27.661 31.674,26.848 31.699,26.822 32.334,26.822 32.41,26.899 32.41,27.635 33.147,28.372 35.636,28.372 35.636,29.616
GND on Top Layer "B" (solid, pour order 81): 31.623,24.714 31.293,24.714 31.267,24.689 31.267,23.368 31.394,23.368 31.674,23.089 31.674,22.022 32.614,22.022 32.741,22.149 32.741,23.216 32.233,23.724 31.648,23.724 31.648,24.689
GND on Top Layer "B" (solid, pour order 78): 25.019,23.216 24.359,23.216 24.13,23.444 24.13,25.679 24.105,25.705 21.793,25.705 21.615,25.527 21.615,20.726 22.047,20.295 25.019,20.295
GND on Top Layer "B" (solid, pour order 77): 28.194,26.619 28.194,24.562 28.042,24.409 27.534,24.409 27.407,24.536 27.407,24.816 27,25.222 21.92,25.222 21.615,25.527 21.615,29.464 21.488,29.591 20.244,29.591 20.168,29.667 20.168,31.902 23.089,31.902 23.241,31.75 23.241,30.81 23.444,30.607 23.876,30.607 23.876,29.362 24.232,29.007 27.94,29.007 28.219,28.727 28.219,28.626
GND on Top Layer "B" (solid, pour order 76): 25.883,21.234 25.883,21.209 25.832,21.158 24.638,21.158 24.486,21.311 24.486,22.987 24.714,23.216 25.019,23.216 25.248,23.444 25.248,24.13 25.298,24.181 25.883,24.181 25.908,24.155 25.908,21.26
GND on Top Layer "B" (solid, pour order 75): 28.905,14.859 29.515,15.469 29.515,15.977 29.693,16.154 33.579,16.154 33.706,16.027 33.706,15.469 34.061,15.113 34.163,15.113 34.531,14.745 34.29,14.503 28.905,14.503
GND on Top Layer "B" (solid, pour order 73): 25.629,39.421 26.289,39.421 26.289,38.786 26.162,38.659 26.162,36.322 26.086,36.246 24.841,36.246 24.714,36.119 24.714,35.535 24.816,35.433 25.781,35.433 25.984,35.636 26.518,35.636 26.568,35.585 26.568,35.027 26.416,34.874 23.724,34.874 23.419,35.179 23.419,36.881 23.241,37.059 20.269,37.059 20.269,39.294 23.597,39.294 23.851,39.04 23.851,38.481 24.003,38.329 24.486,38.329 24.79,38.633 25.451,38.633 25.629,38.811
MOTOR2C on Top Layer "B" (solid, pour order 72): 43.942,10.617 44.044,10.719 52.121,10.719 52.375,10.465 52.375,6.121 52.146,5.893 44.018,5.893 43.942,5.969
MOTOR2A on Top Layer "B" (solid, pour order 71): 44.12,29.261 44.221,29.362 51.994,29.362 52.375,28.981 52.375,25.527 52.07,25.222 52.045,25.222 51.562,24.74 50.622,24.74 50.368,24.486 44.221,24.486 44.12,24.587
MOTOR2B on Top Layer "B" (solid, pour order 70): 44.145,23.444 44.247,23.546 52.121,23.546 52.375,23.292 52.375,18.948 52.172,18.745 44.221,18.745 44.145,18.821
MOTOR3C on Top Layer "B" (solid, pour order 69): 44.12,35.027 44.272,35.179 52.121,35.179 52.375,34.925 52.375,31.318 51.918,30.861 51.206,30.861 51.079,30.734 51.079,30.429 50.902,30.251 44.247,30.251 44.12,30.378
MOTOR3B on Top Layer "B" (solid, pour order 68): 44.145,40.869 44.221,40.945 51.994,40.945 52.375,40.564 52.375,37.186 52.095,36.906 51.714,36.906 50.902,36.093 44.298,36.093 44.145,36.246
GND on Top Layer "B" (solid, pour order 66): 43.332,18.593 43.84,18.593 44.094,18.339 51.181,18.339 51.867,17.653 51.867,15.443 51.562,15.138 49.835,15.138 49.251,14.554 49.251,12.446 48.031,11.227 42.875,11.227 42.824,11.176 41.732,12.268 41.732,17.008 42.335,17.611
MOTOR3A on Top Layer "B" (solid, pour order 60): 44.145,55.016 44.247,55.118 52.121,55.118 52.375,54.864 52.375,51.105 51.562,50.292 44.221,50.292 44.145,50.368
MOTOR4C on Top Layer "B" (solid, pour order 57): 15.291,10.719 15.392,10.719 15.443,10.668 15.443,5.51 15.14,5.207 7.595,5.207 6.985,5.817 6.985,10.516 7.163,10.693
GND on Top Layer "GND" (solid, pour order 29): 35.382,30.353 35.382,28.626 35.636,28.372 36.906,28.372 37.16,28.118 37.44,28.118 37.922,27.635 37.922,25.423 38.123,25.222 39.065,25.222 39.065,29.489 38.862,29.693 36.093,29.693 36.017,29.769 36.017,30.353
GND on Top Layer "B" (solid, pour order 55): 33.934,48.311 33.934,47.244 34.138,47.041 34.671,47.041 34.95,46.761 34.95,44.679 39.167,44.679 39.319,44.831 39.319,48.285
GND on Top Layer "B" (solid, pour order 54): 31.852,42.139 32.487,42.139 32.537,42.189 32.537,42.951 32.664,43.078 32.664,43.51 32.893,43.739 40.259,43.739 40.513,43.993 40.513,44.628 40.259,44.882 33.02,44.882 32.614,45.288 31.852,45.288
MOTOR4B on Top Layer "B" (solid, pour order 50): 15.316,23.546 15.392,23.47 15.392,18.771 15.342,18.72 11.43,18.72 11.074,18.364 7.163,18.364 6.985,18.542 7.01,18.567 7.01,22.555 7.214,22.758 7.899,22.758 8.687,23.546
MOTOR4A on Top Layer "B" (solid, pour order 47): 15.342,29.362 15.418,29.286 15.418,24.587 15.138,24.308 7.163,24.308 6.96,24.511 6.96,28.169 7.214,28.423 7.976,28.423 8.915,29.362
MOTOR5C on Top Layer "B" (solid, pour order 45): 15.367,35.128 8.331,35.128 7.747,34.544 7.112,34.544 6.985,34.417 6.985,30.48 7.264,30.201 15.24,30.201 15.392,30.353
MOTOR5B on Top Layer "B" (solid, pour order 43): 7.163,40.945 6.96,40.742 6.96,36.22 7.137,36.043 15.367,36.043 15.519,36.195 15.519,40.843 15.418,40.945
MOTOR5A on Top Layer "A" (solid, pour order 41): 15.367,55.042 8.357,55.042 8.179,54.864 8.179,54.458 7.849,54.127 7.239,54.127 6.985,53.873 6.985,49.936 7.493,49.428 14.554,49.428 15.367,50.241
GND on Top Layer "GND" (solid, pour order 40): 20.295,18.44 22.53,18.44 22.809,18.161 22.809,16.662 23.038,16.434 23.698,16.434 24.328,15.804 24.328,14.966 24.417,14.877 24.4,14.859 20.295,14.859
GND on Top Layer "GND" (solid, pour order 35): 41.3,24.206 41.834,23.673 43.409,23.673 43.561,23.52 43.561,16.485 41.3,16.485
GND on Top Layer "GND" (solid, pour order 33): 41.046,29.591 43.434,29.591 43.586,29.439 43.586,25.679 41.046,25.679
GND on Top Layer "GND" (solid, pour order 32): 40.488,35.281 43.561,35.281 43.688,35.154 43.688,31.572 43.586,31.471 40.488,31.471
GND on Top Layer "GND" (solid, pour order 31): 7.722,14.961 8.077,14.605 10.389,14.605 10.49,14.503 10.49,12.243 10.719,12.014 11.379,12.014 12.243,11.151 16.579,11.151 18.009,12.581 18.009,17.805 17.501,18.313 12.624,18.313 11.913,17.602 8.103,17.602 7.722,17.221
GND on Top Layer "GND" (solid, pour order 30): 31.293,39.751 31.293,38.735 30.861,38.303 30.861,37.109 30.886,37.084 31.496,37.084 31.598,37.186 31.598,39.751
GND on Top Layer "GND" (solid, pour order 24): 18.491,42.342 11.278,42.342 10.693,42.926 10.693,45.161 10.49,45.364 7.899,45.364 7.595,45.695 7.595,45.72 7.595,48.387 8.23,49.022 15.062,49.022 15.977,49.936 18.491,49.936
GND on Top Layer "GND" (solid, pour order 22): 51.511,45.644 51.308,45.441 49.327,45.441 49.251,45.364 49.251,42.621 48.158,41.529 43.891,41.529 43.586,41.224 43.586,37.465 43.434,37.313 41.097,37.313 41.097,49.479 49.428,49.479 51.511,47.396
GND on Top Layer "GND" (solid, pour order 18): 24.282,54.051 24.282,52.324 24.689,51.918 26.924,51.918 27.051,51.791 27.051,49.962 27.076,49.936 27.711,49.936 27.711,52.934 27.495,53.15 27.495,53.937 27.381,54.051
GND on Top Layer "GND" (solid, pour order 17): 43.561,55.601 43.485,55.677 24.435,55.677 24.282,55.524 24.282,53.721 24.384,53.619 33.401,53.619 34.442,52.578 40.691,52.578 41.25,52.019 41.25,51.537 43.561,51.537
GND on Top Layer "GND" (solid, pour order 14): 37.16,10.211 38.456,8.915 38.456,7.061 43.231,7.061 43.409,7.239 43.409,17.043 41.935,18.517 37.16,18.517
GND on Top Layer "GND" (solid, pour order 13): 16.205,42.342 16.205,47.092 15.977,47.32 15.977,53.721 16.053,53.797 20.066,53.797 20.574,53.289 20.574,42.342
GND on Top Layer "GND" (solid, pour order 12): 16.002,39.624 16.002,36.17 16.256,35.916 17.628,35.916 17.628,33.858 17.831,33.655 17.907,33.731 19.533,33.731 19.533,38.608 18.517,39.624
GND on Top Layer "GND" (solid, pour order 11): 16.002,33.858 16.002,30.357 16.209,30.15 17.628,30.15 17.856,29.921 17.856,27.94 17.983,27.813 19.228,27.813 19.228,33.553 18.898,33.884
GND on Top Layer "GND" (solid, pour order 10): 16.002,28.042 16.002,24.536 16.053,24.486 17.501,24.486 17.831,24.155 17.831,22.022 18.059,21.793 19.99,21.793 19.99,28.042
GND on Top Layer "GND" (solid, pour order 9): 16.002,22.25 16.002,11.836 20.549,11.836 20.549,22.022 20.32,22.25
GND on Top Layer "GND" (solid, pour order 8): 28.448,6.528 28.448,7.874 28.905,8.331 29.743,8.331 31.42,10.008 31.42,11.354 18.034,11.354 18.034,9.83 17.653,9.449 16.053,9.449 15.926,9.322 15.926,4.597 16.154,4.369 28.473,4.369
VM on Top Layer "GND" (solid, pour order 7): 31.623,9.525 30.074,7.976 29.108,7.976 28.981,7.849 28.981,4.318 37.211,4.318 38.024,5.131 38.024,8.738 37.236,9.525
NetD1_C on Top Layer "GND" (solid, pour order 6): 29.185,34.773 21.844,34.773 21.107,34.036 21.107,33.02 21.187,32.94 23.161,32.94 23.368,33.147 26.111,33.147 26.187,33.223 26.187,33.807 26.822,34.442 29.185,34.442
NetD2_C on Top Layer "GND" (solid, pour order 4): 29.185,19.736 26.238,19.736 25.908,20.066 23.165,20.066 23.139,20.041 23.139,19.075 23.19,19.025 25.857,19.025 26.264,19.431 29.185,19.431
GND on Top Layer "GND" (solid, pour order 2): 18.034,14.99 18.034,10.592 18.669,9.957 40.716,9.957 41.377,10.617 41.377,15.016

## Silkscreen, mask and mechanical layers (free items; w line width, h text height)
Top Overlay:
  drawing of 6 lines, arcs and shapes, not listed
  text "C" at 28.118,49.809 h0.81 r180
  text "-" at 27.635,48.997 h0.81
  text "+" at 26.645,48.98 h0.81
  text "1" at 29.261,48.971 h0.81
  text "2" at 30.124,48.971 h0.81
  text "3" at 31.115,48.971 h0.81
  text "4" at 32.08,48.971 h0.81
  text "T" at 33.198,48.971 h0.81
  text "BY - Hornet FPV" at 28.956,45.867 h1.2
  text "IG - Rajnish_idrl" at 28.828,44.859 h1.2
  text "Odisha Drone Community" at 20.879,27.778 h1.8
  text "IDRL" at 20.75,26.16 h2
  text "-" at 25.07,10.236 h1.27
  text "+" at 35.509,10.245 h1.27
Bottom Overlay:
  circle w1.5: c44.943,45.253 r2.85
  circle w1.5: c14.442,45.253 r2.85
  circle w1.5: c14.438,14.756 r2.85
  circle w1.5: c44.943,14.756 r2.85
Mechanical 1:
  circle w0.051: c14.442,14.759 r2
  circle w0.051: c14.442,45.259 r2
  circle w0.051: c44.942,14.759 r2
  circle w0.051: c44.942,45.259 r2
  lines w0.254: 6.692,5.509 ccw(c8.192,5.509) 8.192,4.009 51.192,4.009 ccw(c51.192,5.509) 52.692,5.509 52.692,54.509 ccw(c51.192,54.509) 51.192,56.009 8.192,56.009 ccw(c8.192,54.509) 6.692,54.509 6.692,5.509